# EAGLE board jlpcb-128 copy (EAGLE 5.11)
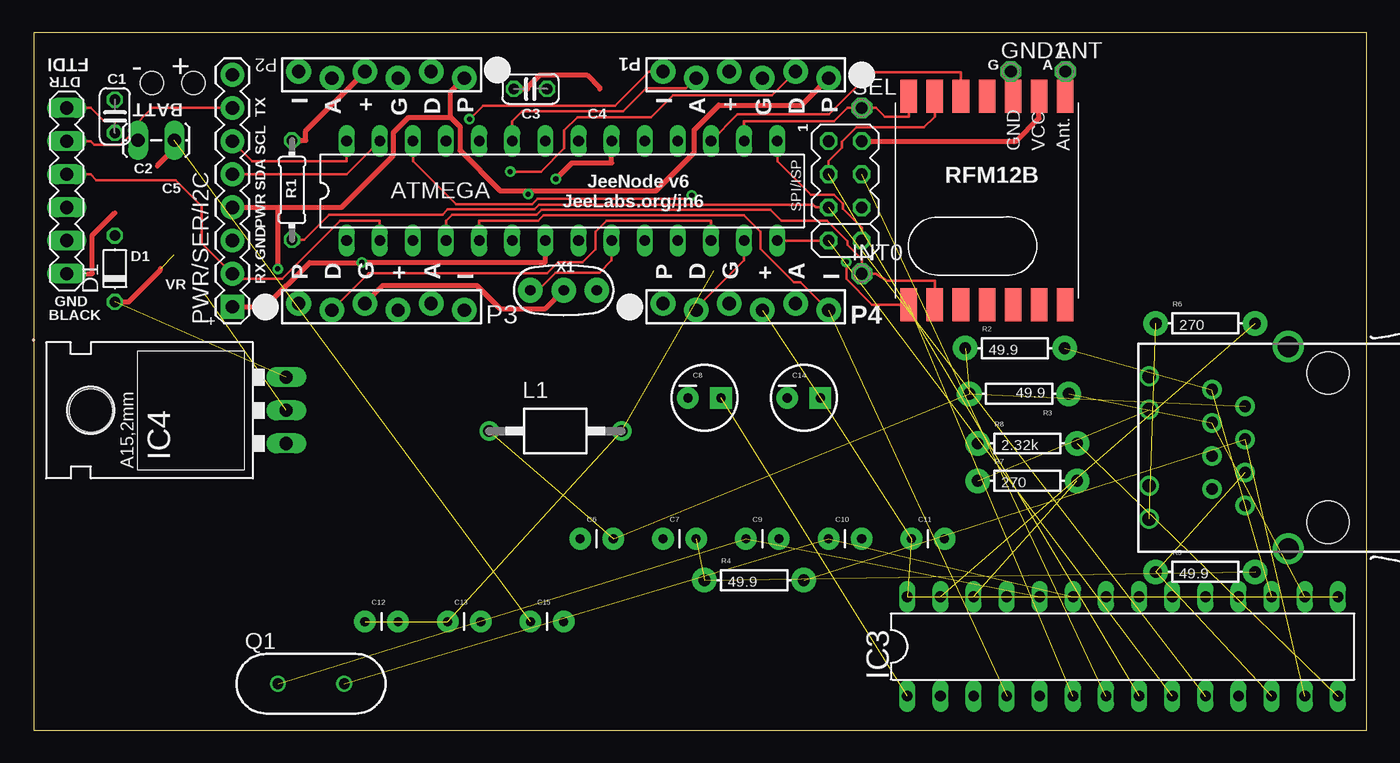
[diagram p0: board, top side]
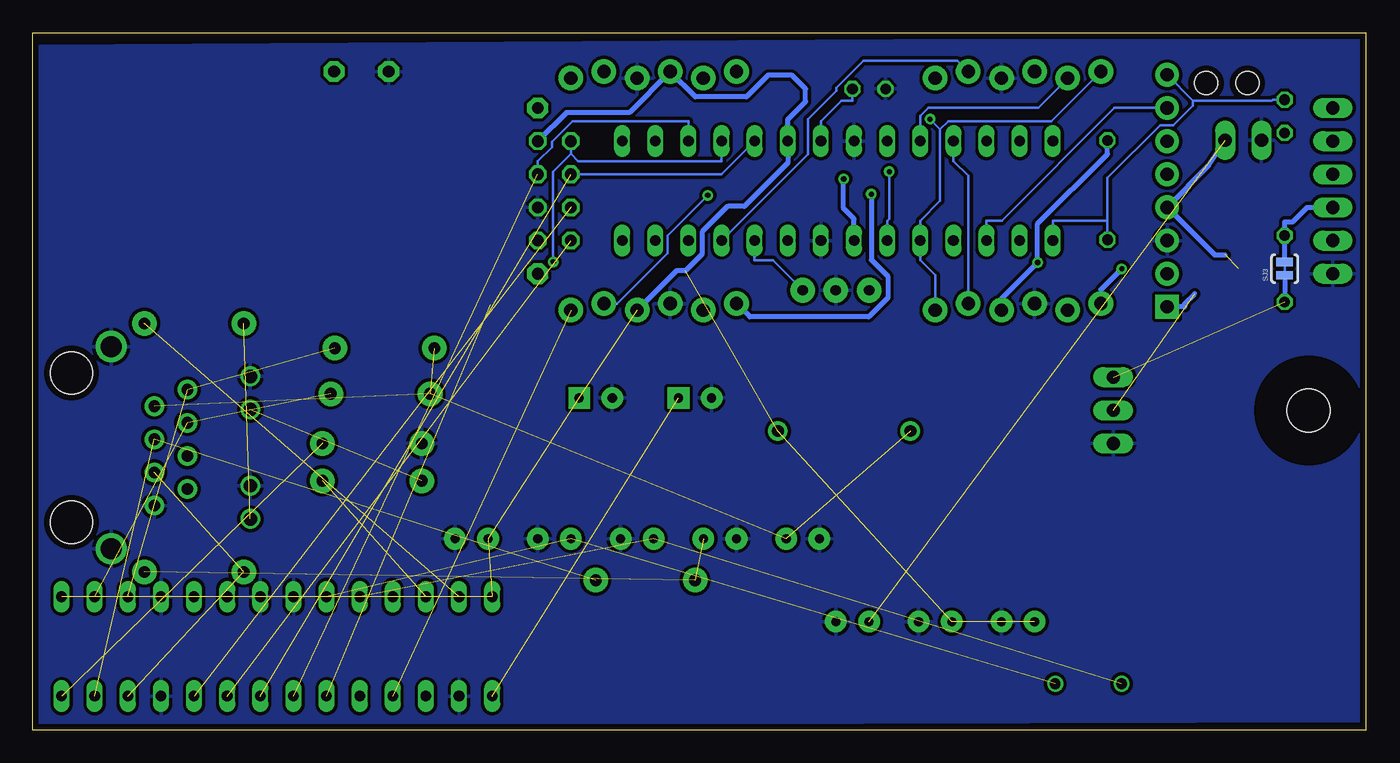
[diagram p1: board, bottom side, seen from below]

Size 102.23 x 53.47 mm. Coordinates in mm from the lower left corner, seen from the top.
Outline: 0,0 102.23,0 102.23,53.47 0,53.47 0,0
Copper layers (1*16): Top 0.035mm / dielectric 1.5mm / Bottom 0.035mm
Design rules "10mils *": minimum track width 8mil, minimum drill 0.4mm, track to track 8mil, track to pad 8mil, pad to pad 8mil, via to via 8mil, smd to smd 8mil, copper to edge 18mil, drill to drill 0.4mm, minimum pad ring 0.15mm, minimum via ring 8mil, stop-mask expansion 4mil, vias tented up to drill 20mil, thermal gap 10mil
Net classes: 1 power: width 0.381 mm, clearance 0.254 mm
Holes 1.78 mm at 9.08,49.59 12.26,49.59

## Footprints (pad centres in the part's own frame; a part is rotated, then mirrored left to right if it is on the bottom)
1,6/0,8 = drill 0.9 pad 1.6 octagon: 1 0,0
C025-024X044 = drill 0.813 octagon: 1 -1.27,0; 2 1.27,0
CAP-PTH-SMALL = drill 0.7 pad 1.651 round: 1 0,0; 2 2.54,0
CPOL-RADIAL-10UF-25V = drill 0.7 pad 1.651 square: 1 1.27,0 | drill 0.7 pad 1.651 round: 2 -1.27,0
D-5 = drill 0.813 octagon: A 2.54,0; C -2.54,0
MA06-1 = drill 1.016 long: 1 0,0; 2 2.54,0; 3 5.08,0; 4 7.62,0; 5 10.16,0; 6 12.7,0
DIL28-3 = drill 0.813 long: 1 -16.51,-3.81; 2 -13.97,-3.81; 3 -11.43,-3.81; 4 -8.89,-3.81; 5 -6.35,-3.81; 6 -3.81,-3.81; 7 -1.27,-3.81; 8 1.27,-3.81; 9 3.81,-3.81; 10 6.35,-3.81; 11 8.89,-3.81; 12 11.43,-3.81; 13 13.97,-3.81; 14 16.51,-3.81; 15 16.51,3.81; 16 13.97,3.81; 17 11.43,3.81; 18 8.89,3.81; 19 6.35,3.81; 20 3.81,3.81; 21 1.27,3.81; 22 -1.27,3.81; 23 -3.81,3.81; 24 -6.35,3.81; 25 -8.89,3.81; 26 -11.43,3.81; 27 -13.97,3.81; 28 -16.51,3.81
TO220L1 = drill 1.016 long: 1 -2.54,-3.81; 2 0,-3.81; 3 2.54,-3.81 | hole 3.302: 0,11.176
1X02_LOCK_LONGPADS = drill 1.016 long: 1 -0.127,0; 2 2.667,0
BL01RN1A = drill 0.9 pad 1.5 round: 1 -5.08,0; 2 5.08,0
1X06_FEMALE_LOCK.010 = drill 1.016 pad 1.88 round: 1 0,0.254; 2 2.54,-0.254; 3 5.08,0.254; 4 7.62,-0.254; 5 10.16,0.254; 6 12.7,-0.254
1X08 = drill 1.016 pad 1.829 square: 1 0,0 | drill 1.016 pad 1.829 round: 2 2.54,0; 3 5.08,0; 4 7.62,0; 5 10.16,0; 6 12.7,0; 7 15.24,0; 8 17.78,0
HC49US = drill 0.813 round: 1 -2.54,0; 2 2.54,0
0204/7 = drill 0.813 octagon: 1 -3.81,0; 2 3.81,0
AXIAL-0.3 = drill 0.9 pad 1.88 round: P$1 -3.81,0; P$2 3.81,0
SJ_2S-TRACE = smd 0.635 x 1.27: 1 -0.508,0; 2 0.508,0
MA04-2 = drill 0.9 octagon: 1 -3.81,-1.27; 2 -3.81,1.27; 3 -1.27,-1.27; 4 -1.27,1.27; 5 1.27,-1.27; 6 1.27,1.27; 7 3.81,-1.27; 8 3.81,1.27
RFM12B = smd 2.54 x 1.27: ANT 8,-6; FFS -8,2; GND 8,-2; IRQ -8,4; P$8 -8,0; P$9 -8,-2; P$10 -8,-4; P$12 -8,-6; P$16 8,0; SCK 8,4; SDI 8,2; SDO -8,6; SEL 8,6; VDD 8,-4
RESONATOR-PTH = drill 0.8 pad 1.88 round: 1 -2.54,0; 2 0,0; 3 2.54,0
SI-50170 = drill 0.9 pad 1.5 round: 1 4.445,5.842; 2 3.175,3.302; 3 1.905,5.842; 4 0.635,3.302; 5 -0.635,5.842; 6 -1.905,3.302; 7 -3.175,5.842; 8 -4.445,3.302 | drill 1.016 pad 1.5 round: A1 -5.461,10.668; A2 2.921,10.668; C1 -2.921,10.668; C2 5.461,10.668 | drill 1.6 pad 2.2 round: S1 -7.747,0; S2 7.747,0 | hole 3.251: -5.715,-3.048; 5.715,-3.048

## Placement (x,y rotation side)
ANT  [1,6/0,8]  79.12,50.48 0 top
C1  0.1µ  [C025-024X044]  6.22,47.05 270 top
C3  0.1µ  [C025-024X044]  38.1,49.15 180 top
C6  .1µ  [CAP-PTH-SMALL]  41.91,14.67 0 top
C7  .1µ  [CAP-PTH-SMALL]  48.26,14.67 0 top
C8  10µ  [CPOL-RADIAL-10UF-25V]  51.44,25.46 0 top
C9  20p  [CAP-PTH-SMALL]  54.61,14.67 0 top
C10  20p  [CAP-PTH-SMALL]  60.96,14.67 0 top
C11  .1µ  [CAP-PTH-SMALL]  67.31,14.67 0 top
C12  .1µ  [CAP-PTH-SMALL]  25.4,8.32 0 top
C13  .1µ  [CAP-PTH-SMALL]  31.75,8.32 0 top
C14  10µ  [CPOL-RADIAL-10UF-25V]  59.05,25.46 0 top
C15  .1µ  [CAP-PTH-SMALL]  38.1,8.32 0 top
D1  [D-5]  6.22,35.37 90 top
FTDI  FTDI  [MA06-1]  2.54,34.99 90 top
GND1  [1,6/0,8]  74.93,50.48 0 top
IC1  ATMEGA  [DIL28-3]  40.51,41.34 0 top
IC3  ENC28J60SP  [DIL28-3]  83.5,6.41 0 top
IC4  LD117AV33  [TO220L1]  15.56,24.51 90 top
INT0  [1,6/0,8]  63.5,34.99 0 top
JP1  BATT  [1X02_LOCK_LONGPADS]  10.67,45.21 180 top
L1  BL01RN1A  [BL01RN1A]  40.01,22.92 0 top
P1  JEEPORT  [1X06_FEMALE_LOCK.010]  60.96,50.23 180 top
P2  JEEPORT  [1X06_FEMALE_LOCK.010]  33.02,50.23 180 top
P3  JEEPORT  [1X06_FEMALE_LOCK.010]  20.32,32.45 0 top
P4  JEEPORT  [1X06_FEMALE_LOCK.010]  48.26,32.45 0 top
PWR/SER/I2C  [1X08]  15.24,32.45 90 top
Q1  [HC49US]  21.27,3.56 0 top
R1  10k  [0204/7]  19.81,41.4 90 top
R2  49.9  [AXIAL-0.3]  75.25,29.27 0 top
R3  49.9  [AXIAL-0.3]  75.56,25.78 180 top
R4  49.9  [AXIAL-0.3]  55.24,11.49 0 top
R5  49.9  [AXIAL-0.3]  89.85,12.13 0 top
R6  270  [AXIAL-0.3]  89.85,31.18 0 top
R7  270  [AXIAL-0.3]  76.2,19.11 0 top
R8  2.32k  [AXIAL-0.3]  76.2,21.97 0 top
SEL  [1,6/0,8]  63.5,47.69 0 top
SJ3  SOLDERJUMPERTRACE  [SJ_2S-TRACE]  6.22,35.37 90 bottom
SV7  SPI/ISP  [MA04-2]  62.23,41.34 270 top
U$1  RFM12B  [RFM12B]  73.1,40.6 90 top
X1  16 MHz  [RESONATOR-PTH]  40.64,33.72 0 top
X2  SI-50170  [SI-50170]  96.2,21.65 90 top

## Library data of the parts
ANT FTDI GND1 INT0 P1-P4 SEL SV7 U$1 = JeeLabs
C1 C3 R1 = resistor
C6-C15 JP1 PWR/SER/I2C Q1 R2-R8 SJ3 X1 = SparkFun
D1 = diode
IC1 = atmega8
IC3 = microchip
IC4 = v-reg
L1 = inductors
X2 = con-stewart

## Nets
A0: IC1.23 P1.5
A1: IC1.24 P2.5
A2: IC1.25 P3.5
A3: IC1.26 P4.5
B0: IC1.14 IC3.9 SV7.7
GND [power]: C3.2 C6.1 C7.1 C8.2 C9.2 C10.2 C11.2 C12.2 C13.2 C14.2 C15.2 FTDI.1 GND1.1 IC1.8 IC1.22 IC3.2 IC3.11 IC3.18 IC3.21 IC3.22 IC4.1 JP1.2 P1.3 P2.3 P3.3 P4.3 PWR/SER/I2C.3 R8.P$1 SV7.6 U$1.GND X1.2 X2.8 X2.C1 X2.C2 X2.S1 X2.S2
INT2: IC1.5 IC3.4 P1.6 P2.6 P3.6 P4.6
MISO: IC1.18 IC3.6 SV7.1 U$1.SDO
MOSI: IC1.17 IC3.7 SV7.4 U$1.SDI
N$1: IC1.9 X1.1
N$4: IC1.16 SEL.1 U$1.SEL
N$6: IC1.15 SV7.8
N$7: IC1.4 INT0.1 U$1.IRQ
N$8: IC1.6 P1.2
N$9: IC1.11 P2.2
N$10: IC1.12 P3.2
N$11: IC1.13 P4.2
N$12 [power]: D1.A FTDI.3 SJ3.2
N$13: ANT.1 U$1.ANT
N$17 [power]: C6.2 L1.1 R2.P$1 R3.P$2 X2.2
N$19: C3.1 IC1.21
N$20: C1.2 FTDI.6
N$21: IC1.10 X1.3
N$23 [power]: IC3.17 R2.P$2 X2.1
N$24: IC1.28 PWR/SER/I2C.6
N$25: IC1.27 PWR/SER/I2C.5
N$26 [power]: IC3.16 R3.P$1 X2.3
N$27 [power]: IC3.13 R4.P$2 X2.4
N$28 [power]: IC3.12 R5.P$1 X2.6
N$29: R6.P$1 X2.A1
N$30: R7.P$1 X2.A2
N$31: IC3.26 R7.P$2
N$32: IC3.27 R6.P$2
N$33: C8.1 IC3.1
N$34: IC3.14 R8.P$2
N$35 [power]: C9.1 IC3.24 Q1.1
N$36 [power]: C10.1 IC3.23 Q1.2
N$37 [power]: C7.2 R4.P$1 R5.P$2
PWR [power]: C15.1 D1.C IC4.3 JP1.1 P1.1 P2.1 P3.1 P4.1 PWR/SER/I2C.4 SJ3.1
RST: C1.1 IC1.1 IC3.10 PWR/SER/I2C.8 R1.1 SV7.5
RXD: FTDI.4 IC1.2 PWR/SER/I2C.2
SCK: IC1.19 IC3.8 SV7.3 U$1.SCK
TXD: FTDI.5 IC1.3 PWR/SER/I2C.7
VCC [power]: C11.1 C12.1 C13.1 C14.1 IC1.7 IC1.20 IC3.15 IC3.19 IC3.20 IC3.25 IC3.28 IC4.2 L1.2 P1.4 P2.4 P3.4 P4.4 PWR/SER/I2C.1 R1.2 SV7.2 U$1.VDD

## Tracks (layer width: path | path; a pad name or v marks a point on that pad's centre or on a via)
A0
  Top 0.203: P1.5 50.01,49.19 46.96,49.19 45.2,47.43 37.46,47.43 36.7,46.67 IC1.23
A1
  Bottom 0.203: P2.5 25.12,47.71 33.55,47.71 34.16,47.09 IC1.24
A2
  Bottom 0.203: IC1.25 31.62,43.62 30.48,42.48 P3.5
A3  (via drill 0.4 pad 0.81)
  Top 0.203: v50.46,41 50.19,40.73 38.64,40.73 38.23,40.33 32.38,40.33 29.08,43.62 IC1.26
  Bottom 0.203: P4.5 57.4,32.7 53.57,36.54 53.57,37.89 v50.46,41
B0  (1 unrouted)
  Top 0.203: IC1.14 SV7.7
GND
  Top 0.381: C3.2 37.88,49.15 37.88,49.28 38.83,50.22 42.43,50.22 43.4,49.26 43.4,49.15 | X1.2 39.24,32.32 35.75,32.32 33.97,34.1 26.8,34.1 P3.3 | FTDI.1 4.51,34.99 4.51,37.94 6.22,39.65 | U$1.GND 75.1,50.32 GND1.1
  pour Bottom: 0.32,53.15 101.92,52.51 102.23,0.32 0.32,0.64
INT2  (via drill 0.4 pad 0.81)  (1 unrouted)
  Top 0.203: v33.42,46.83 34.46,47.87 44.59,47.87 47.2,50.48 P1.6 | P4.6 58.81,34.35 58.29,34.35 55.72,36.92 55.72,38.2 54.46,39.46 39.09,39.46 38.68,39.05 34.16,39.05 IC1.5
  Bottom 0.203: 32.64,46.05 32.64,40.57 34.16,39.05 IC1.5 34.16,36 33.02,34.86 P3.6 | P2.6 24.13,46.67 32.02,46.67 32.64,46.05 | 32.64,46.05 v33.42,46.83
MISO  (via drill 0.4 pad 0.81)  (1 unrouted)
  Top 0.203: U$1.SDO 64.3,32.6 62.31,34.58 v62.31,35.9
  Bottom 0.203: v62.31,35.9 62.31,42.81 60.96,44.17 | 60.96,44.17 60.42,43.62 49.4,43.62 IC1.18 | 60.96,44.17 SV7.1
MOSI  (1 unrouted)
  Top 0.203: U$1.SDI 71.1,50.43 64.21,50.43 60.97,47.19 53.98,47.19 IC1.17
  Bottom 0.203: SV7.4 63.5,43.59 62.41,44.68 62.41,45.1 60.83,46.67 51.94,46.67 IC1.17
N$1
  Top 0.203: IC1.9 44.32,36 43.38,35.06 40.02,35.06 38.67,33.72 X1.1
N$4
  Top 0.203: U$1.SEL 67.1,47.03 65.27,47.03 64.61,47.69 SEL.1 62.4,47.69 61.38,46.67 54.48,46.67 IC1.16
N$6
  Top 0.203: IC1.15 57.02,43.62 59.6,41.05 61.37,41.05 62.06,40.36 62.06,39.95 63.5,38.51 SV7.8
N$7
  Top 0.203: U$1.IRQ 69.1,34.43 65.42,34.43 64.61,34.99 INT0.1 63.5,36.09 62.4,37.2 62.4,37.49 60.83,39.05 57.33,39.05 56.5,39.88 38.94,39.88 38.57,39.51 32.08,39.51 31.62,39.05 IC1.4
N$8  (via drill 0.4 pad 0.81)
  Top 0.203: P1.2 56.6,48.66 49.03,48.66 47.36,46.99 41.7,46.99 40.68,45.97 40.68,44.59 38.89,42.8 v36.54,42.8
  Bottom 0.203: IC1.6 36.7,39.05 36.54,39.22 v36.54,42.8
N$9
  Bottom 0.203: P2.2 31.3,51.3 38.54,51.3 40.6,49.24 40.6,49.03 42.79,46.84 42.79,44.15 IC1.11
N$10
  Top 0.203: IC1.12 51.94,39.05 43.94,39.05 43.09,38.2 43.09,36.84 42.09,35.85 40.23,35.85 39.38,35 25.67,35 P3.2
N$11
  Top 0.203: IC1.13 54.48,36 50.8,32.32 P4.2
N$12
  Bottom 0.381: SJ3.2 D1.A 6.22,38.96 5.61,38.96 4.51,40.07 FTDI.3
N$13
  Top 0.203: U$1.ANT 79.1,50.18 79.12,50.2 ANT.1
N$14
  Top 0.005: 0.02,29.86 arc10 0.03,29.86 | 0.04,29.88 arc19 0.05,29.9 | 0.05,29.92 arc19 0.04,29.94 | 0.03,29.95 arc19 0.01,29.96 | -0.03,29.95 arc-19 -0.01,29.96 | -0.05,29.92 arc-19 -0.04,29.94 | -0.04,29.88 arc-19 -0.05,29.9 | -0.02,29.86 arc-10 -0.03,29.86 | -0.02,29.91 arc68 -0.01,29.89 | 0.01,29.89 arc248 -0.02,29.91 | 0.02,29.86 arc10 0.03,29.86 | 0.04,29.88 arc19 0.05,29.9 | 0.05,29.92 arc19 0.04,29.94 | 0.03,29.95 arc19 0.01,29.96 | -0.03,29.95 arc-19 -0.01,29.96 | -0.05,29.92 arc-19 -0.04,29.94 | -0.04,29.88 arc-19 -0.05,29.9 | -0.02,29.86 arc-10 -0.03,29.86 | -0.02,29.91 arc68 -0.01,29.89 | 0.01,29.89 arc248 -0.02,29.91 | 0.02,29.86 arc10 0.03,29.86 | 0.03,29.86 0.05,29.85 0.06,29.86 0.04,29.88 | 0.04,29.88 arc19 0.05,29.9 | 0.05,29.9 0.08,29.9 0.08,29.92 0.05,29.92 | 0.05,29.92 arc19 0.04,29.94 | 0.04,29.94 0.06,29.95 0.05,29.97 0.03,29.95 | 0.03,29.95 arc19 0.01,29.96 | 0.01,29.96 0.01,29.98 -0.01,29.98 -0.01,29.96 | -0.03,29.95 arc-19 -0.01,29.96 | -0.03,29.95 -0.05,29.97 -0.06,29.95 -0.04,29.94 | -0.05,29.92 arc-19 -0.04,29.94 | -0.05,29.92 -0.08,29.92 -0.08,29.9 -0.05,29.9 | -0.04,29.88 arc-19 -0.05,29.9 | -0.04,29.88 -0.06,29.86 -0.05,29.85 -0.03,29.86 | -0.02,29.86 arc-10 -0.03,29.86 | -0.01,29.89 -0.02,29.86 | -0.02,29.91 arc68 -0.01,29.89 | 0.01,29.89 arc248 -0.02,29.91 | 0.02,29.86 0.01,29.89
N$17  (4 unrouted)
N$19
  Bottom 0.203: C3.1 39.37,48.23 40.22,48.23 41.78,46.67 IC1.21
N$20
  Top 0.203: C1.2 6.22,46.7 5.36,46.7 4.37,47.69 FTDI.6
N$21
  Bottom 0.203: IC1.10 46.86,36 45.47,36 X1.3
N$23  (2 unrouted)
N$24
  Top 0.203: IC1.28 24,43.62 16.76,43.62 PWR/SER/I2C.6
N$25
  Top 0.203: PWR/SER/I2C.5 24,42.61 IC1.27
N$26  (2 unrouted)
N$27  (2 unrouted)
N$28  (2 unrouted)
N$29  (1 unrouted)
N$30  (1 unrouted)
N$31  (1 unrouted)
N$32  (1 unrouted)
N$33  (1 unrouted)
N$34  (1 unrouted)
N$35  (2 unrouted)
N$36  (2 unrouted)
N$37  (2 unrouted)
PWR  (via drill 0.4 pad 0.81)  (3 unrouted)
  Top 0.381: 31.98,46.97 31.98,48.93 P2.1 | 37.92,41.34 35.78,41.34 32.68,44.44 32.68,46.26 31.98,46.97 | 18.72,40.07 23.6,40.07 27.6,44.07 27.6,45.81 28.75,46.97 31.98,46.97 | P1.1 58.89,47.9 52.55,47.9 50.67,46.03 50.67,44.3 47.71,41.34 37.92,41.34 | 37.92,41.34 v37.92,41.09 | 18.72,40.07 v18.72,35.36 | PWR/SER/I2C.4 18.72,40.07 | D1.C 7.28,32.83 9.74,35.29 9.74,35.37 | JP1.1 10.86,45.53 10.86,44.62 9.48,43.24
  Bottom 0.381: v37.92,41.09 37.92,36.04 36.66,34.78 36.66,33.14 38.12,31.68 47.24,31.68 P4.1 | 10.79,36.42 11.6,36.42 PWR/SER/I2C.4 12.06,43.24 JP1.1 | v18.72,35.36 20.32,33.76 P3.1 | SJ3.1 D1.C
RST  (1 unrouted)
  Top 0.203: R1.1 20.73,37.59 22.66,39.52 31.34,39.52 31.74,39.92 38.4,39.92 38.77,40.29 59.76,40.29 59.98,40.07 SV7.5
  Bottom 0.203: 19.81,39.05 19.81,42.33 15.77,46.37 14.76,46.37 13.27,47.87 13.27,48.25 | 19.81,39.05 R1.1 | 19.81,39.05 24,39.05 IC1.1 | 13.27,48.25 7.21,48.25 7.14,48.32 C1.1 | 13.27,48.25 PWR/SER/I2C.8
RXD
  Top 0.203: IC1.2 26.54,39.05 23.52,39.05 19.05,34.59 15.64,34.59 PWR/SER/I2C.2 12.89,37.34 12.89,40.16 10.89,42.17 4.81,42.17 4.37,42.61 FTDI.4
SCK  (1 unrouted)
  Top 0.203: SV7.3 60.96,43.59 62,44.63 62,45.11 63.09,46.2 68.27,46.2 69.1,47.03 U$1.SCK
  Bottom 0.203: SV7.3 49.4,42.61 IC1.19
TXD
  Top 0.203: FTDI.5 4.37,45.15 4.66,44.86 6.63,44.86 7.47,45.69 7.47,46.07 9.09,47.69 PWR/SER/I2C.7
  Bottom 0.203: IC1.3 29.08,39.05 27.9,39.05 19.27,47.69 PWR/SER/I2C.7
VCC  (via drill 0.4 pad 0.81)  (11 unrouted)
  Top 0.381: PWR/SER/I2C.1 17.75,32.45 21.15,35.84 v25.17,35.84 25.2,35.87 39.24,35.87 IC1.7 | IC1.20 44.32,43.48 41.27,43.48 v40.04,42.25 | R1.2 20.87,45.21 20.87,45.95 P2.4 | U$1.VDD 77.1,46.89 75.36,45.15 SV7.2
  Bottom 0.381: P3.4 27.94,33.07 v25.17,35.84 25.17,38.8 19.81,44.16 R1.2 | SV7.2 61.31,47.34 56.48,47.34 P1.4 51.41,48.55 47.49,48.55 45.83,50.22 44.02,50.22 42.96,49.15 42.96,48.17 44.32,46.81 IC1.20 44.32,43.48 47.66,40.15 48.93,40.15 50.89,38.19 50.89,36.48 52.17,35.2 52.87,35.2 P4.4 | IC1.7 39.24,39.19 40.04,39.99 v40.04,42.25 | PWR/SER/I2C.1 13.88,32.45 13.88,32.7 13.12,33.46

## Text on the board
_tsilk: FTDI | P1 | G | A | DTR | C1 | - | + | TX | I | A | + | G | D | P | I | A | + | G | D | P | SCL | C3 | C4 | 1 | SDA | C2 | JeeNode v6 | RFM12B | C5 | PWR | R1 | JeeLabs.org/jn6 | GND | D1 | RX | P | D | G | + | A | I | X1 | P | D | G | + | A | I | VR | GND | BLACK | + | P4
_bsilk: FTDI | RST | P2 | P1 | green | JeeNode v6 | GND | ANT | DTR | BATT | TXD | IRQ | AIO | +3V | GND | DIO | PWR | IRQ | AIO | +3V | GND | DIO | PWR | SS | PWR/SER/I2C/EXT | JeeLabs.org/jn6 | 433 - | 1 | +3V | RX | SCL | TX | - | + | SDA | SPI/ISP | 868 - | PWR | PWR | GND | GND | NC | B0 | B1 | 915 MHz | RXD | PWR | DIO | GND | +3V | AIO | IRQ | PWR | DIO | GND | +3V | AIO | IRQ | I0 | +3V | black | GND | P3 | P4